# Altium PCB LCD.PcbDoc
Units mil, origin at the board's own origin, x right, y up, seen from the top; angles counter-clockwise.
Board outline 2155.85 x 1493.43 mil, 2 copper layers (Top Layer, Bottom Layer), stack 61.811 mil thick; 11 components, 19 nets, 50 pads, 0 vias.
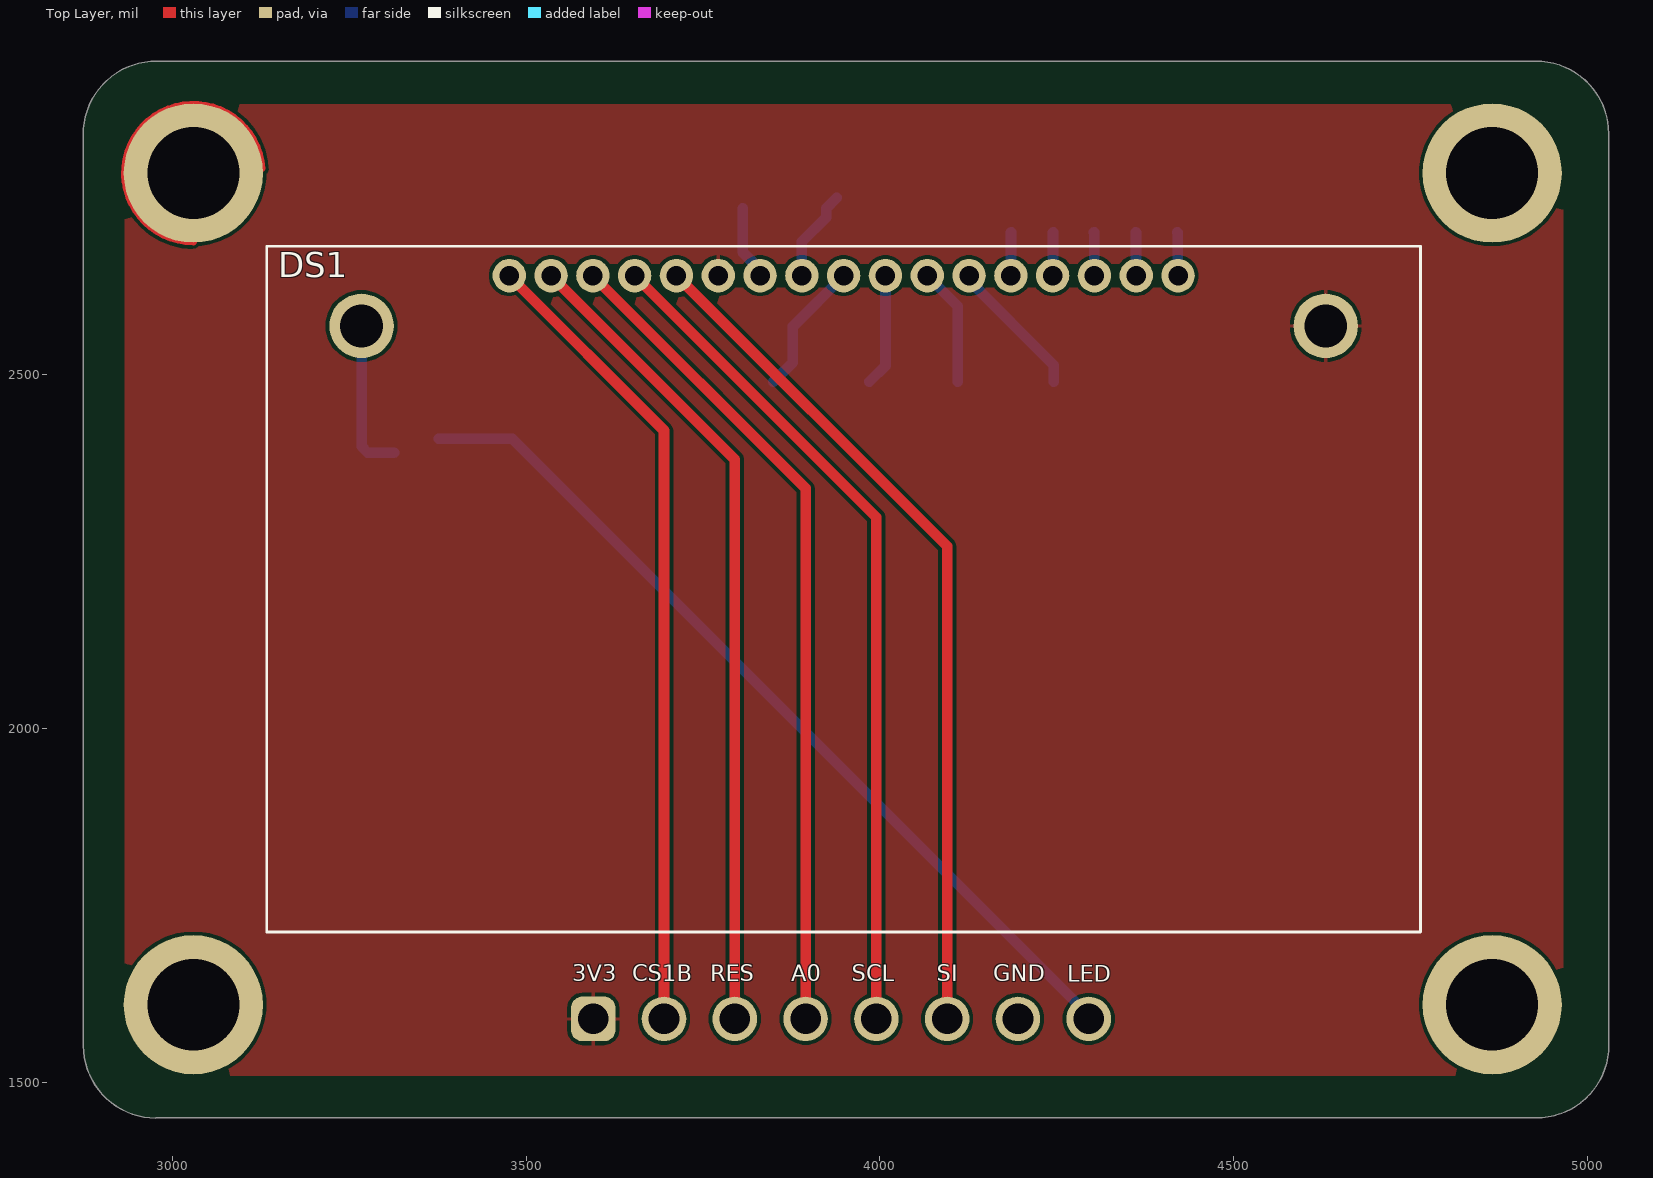
[diagram p0: Top Layer view]
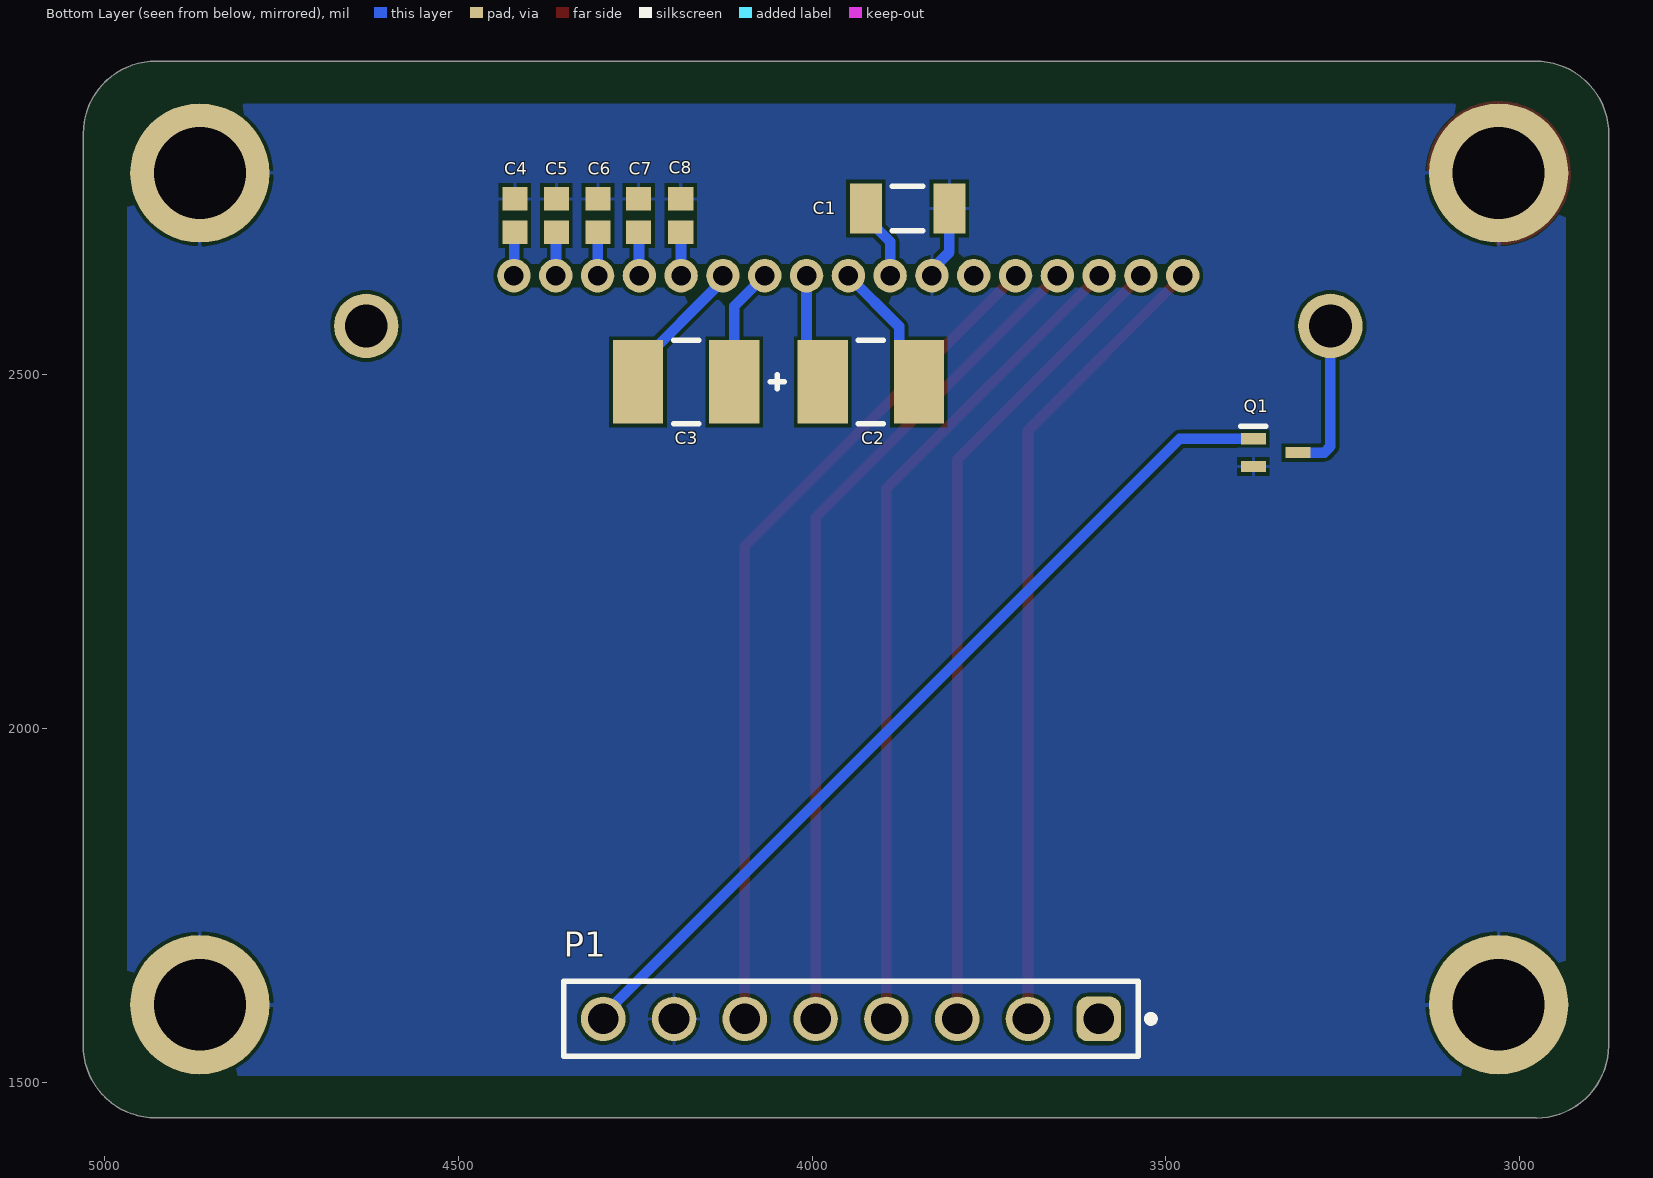
[diagram p1: Bottom Layer view, seen from below]

## Layer stack, top to bottom
Top Solder: solder mask 0.5, Solder Resist, Dk 3.8
Top Layer: signal copper 1.378
Dielectric: core 59.0551, FR-4, Dk 4.5
Bottom Layer: signal copper 1.378
Bottom Solder: solder mask 0.5, Solder Resist, Dk 3.8

## Board outline
2874.65,1552.26 ccw(c2977.07,1552.26) 2977.07,1449.84 2976.91,1450 4930,1450 4927.34,1450.12 ccw(c4927.34,1552.54) 5029.77,1552.54 5030,1550 5029.69,2840.31 ccw(c4926.73,2840.31) 4926.73,2943.27 2978.27,2943.27 ccw(c2978.27,2839.15) 2874.15,2839.15

## Design rules (kind name [scope] priority, off if disabled: settings)
BoardOutlineClearance [All] p1: gap=7.87 ignorepadtopadclearanceinfootprint=FALSE
Clearance [All] p1: gap=5 ignorepadtopadclearanceinfootprint=FALSE except(9.84: Arc-Hole Track-Hole SMDPad-Hole THPad-Hole Via-Hole Fill-Hole Poly-Hole Region-Hole Text-Hole)
ComponentClearance [All] p1: gap=5 collisioncheckmode=3 verticalgap=5 showdistances=TRUE
DiffPairsRouting [All] p1: maxlimit=10 minlimit=5 mostfreqgap=5 toplayer_minwidth=5 toplayer_maxwidth=1000 toplayer_prefwidth=5 bottomlayer_minwidth=5 bottomlayer_maxwidth=1000 bottomlayer_prefwidth=5 maxuncoupledlength=500
Height [All] p1: minheight=0 maxheight=71497.94 prefheight=500
HoleSize [All] p1: absolutevalues=TRUE maxlimit=248.03 minlimit=11.81 maxpercent=80.000 minpercent=20.000
HoleToHoleClearance [All] p1: gap=9.84 allowstackedmicrovias=FALSE
MinimumAnnularRing [All] p1: minimumring=3
MinimumSolderMaskSliver [All] p1: minsoldermaskwidth=0
PlaneClearance [All] p1: clearance=5
PlaneConnect PlaneConnectPowerPads [InPadClass('PowerPads')] p1: planeconnectstyle=Direct reliefexpansion=20 reliefentries=4 reliefconductorwidth=10 reliefairgap=10
PlaneConnect [All] p2: pad.planeconnectstyle=Relief pad.reliefexpansion=11.81 pad.reliefentries=4 pad.reliefconductorwidth=5 pad.reliefairgap=5 via.planeconnectstyle=Direct via.reliefexpansion=11.81 via.reliefentries=4 via.reliefconductorwidth=5 via.reliefairgap=5
PolygonConnect PolygonConnectPowerPads [All vs (InPadClass('PowerPads'))] p1: connectstyle=Direct reliefconductorwidth=10 reliefentries=4 polygonreliefangle="90 Angle" airgapwidth=10
PolygonConnect [All] p2: thpad.connectstyle=Relief thpad.reliefconductorwidth=5 thpad.reliefentries=4 thpad.polygonreliefangle="90 Angle" thpad.airgapwidth=5 smdpad.connectstyle=Relief smdpad.reliefconductorwidth=5 smdpad.reliefentries=4 smdpad.polygonreliefangle="90 Angle" smdpad.airgapwidth=5 via.connectstyle=Direct via.reliefconductorwidth=5 via.reliefentries=4 via.polygonreliefangle="90 Angle" via.airgapwidth=5
RoutingVias [All] p1: holewidth=11.81 width=23.62 viastyle="Through Hole" minholewidth=11.81 minwidth=23.62 maxholewidth=23.62 maxwidth=259.84
SilkToSilkClearance [All] p1: silktosilkclearance=0
SilkToSolderMaskClearance [IsPad] p1: minsilkscreentomaskgap=5 clearancetoexposedcopper=TRUE
SolderMaskExpansion [All] p1: expansion=2.95 istentingtop=FALSE
SupplyNets "Schematic Supply Nets_2" [InNet('GND')] p1: voltage=0.000
SupplyNets "Schematic Supply Nets" [InNet('+3V3')] p2: voltage=0.000
Width [All] p1: maxlimit=1000 minlimit=5 preferedwidth=5 minimp=50.000000 maximp=50.000000 favimp=50.000000
20 further rules are at their usual default settings.

## Components (designator, comment, footprint, x,y, rotation, side; value= is the part's Value field where it differs from the comment)
C1 "1uF" CAPC1206(3216)130_N 3865,2735 r180 bottom
C2 "1uF Tantalum" FP-293DB-MFG 3917.09,2490 r0 bottom
C3 "1uF Tantalum" FP-293DB-MFG 4177.91,2490 r180 bottom
C4 "100nF" CAPC1608X87X45LL20T05 4420,2725 r270 bottom
C5 "100nF" CAPC1608X87X45LL20T05 4361.3,2725 r270 bottom
C6 "100nF" CAPC1608X87X45LL20T05 4302.4,2725 r270 bottom
C7 "100nF" CAPC1608X87X45LL20T05 4245,2725 r270 bottom
C8 "100nF" CAPC1608X87X45LL20T05 4185.54,2725 r270 bottom
DS1 "NHD-C12832A1Z-FSW-FBW-3V3" NHDC12832A1ZFSWFBW3V3 4421.22,2640 r180 top
P1 "61300811121" 61300811121 3945,1590 r0 bottom
Q1 "DMN313DLT-7" SOT50P160X90-3N 3345,2390 r180 bottom

## Footprints (in the part's own frame and the unit in brackets; to place one, negate y for a bottom-side part, rotate by r counter-clockwise, add the part's x,y. Pads: shape width x height; smd on the part's side, far side on the other; paste and mask are expansions set on the pad)
61300811121 [mm] "Pin Header, pitch 2.54 mm, THT, Vertical, single row, 8p"
  rrect50% 1.6x1.6 hole 1.1: 1(-8.89,0)
  round 1.6 hole 1.1: 2(-6.35,0) 3(-3.81,0) 4(-1.27,0) 5(1.27,0) 6(3.81,0) 7(6.35,0) 8(8.89,0)
  silkscreen extent -10.88,-1.35 10.31,1.35, body extent -10.16,-1.27 10.16,1.27, height 8.57
CAPC1206(3216)130_N [mm] "Chip Capacitor, Body 3.2x1.6mm, Height 1.3mm, IPC Medium Density"
  rect 1.15x1.8 smd: 1(-1.5,0) 2(1.5,0)
  silkscreen extent -0.55,-0.8 0.55,0.8, body extent -1.7,-0.9 1.7,0.9, height 1.3
CAPC1608X87X45LL20T05 [mm] "Chip Capacitor, 2-Leads, Body 1.60x0.80mm, IPC High Density"
  rect 0.85x0.9 smd: 1(-0.6,0) 2(0.6,0)
  body extent -0.9,-0.5 0.9,0.5, height 0.87
FP-293DB-MFG [mm]
  rect 1.8x3 smd paste+0 mask+0: 1(-1.725,0) 2(1.725,0)
  silkscreen extent -0.45,-1.5 0.45,1.5, body extent -1.75,-1.4 1.75,1.4, height 2.1
NHDC12832A1ZFSWFBW3V3 [mm]
  round 1.2 hole 0.7: 1(0,0) 2(1.5,0) 3(3,0) 4(4.5,0) 5(6,0) 6(7.5,0) 7(9,0) 8(10.5,0) 9(12,0) 10(13.5,0) 11(15,0) 12(16.5,0) 13(18,0) 14(19.5,0) 15(21,0) 16(22.5,0) 17(24,0)
  round 2.31 hole 1.54: MH1(-5.3,1.8) MH2(29.3,1.8)
  silkscreen extent -8.7,-1.06 32.7,23.55, body extent -8.7,-0.75 32.7,23.55, height 4.3
SOT50P160X90-3N [mm]
  rect 0.9x0.4 smd: 1(-0.8,0.5) 2(-0.8,-0.5) 3(0.8,0)
  silkscreen extent -1.25,0.95 -0.35,0.95, body extent -0.8,-0.8 0.8,0.8, height 0.9

## Part data
C1: library part CMP-1037-04671-1, "CAP 1uF 10V ±5% 1206 (3216 Metric) Thickness 1.3mm SMD", Case-EIA=1206, Case-Metric=3216, Rated Voltage="10 V", Tolerance=Â±5%, Max Thickness="1.3 mm", Technology=SMT
C2 C3: library part CMP-00030-39694356-1, "293D105X9050B2TE3 Cap Tant Solid 1uF 50V B CASE 10% (3.5 X 2.8 X 1.9mm) Inward L SMD 3528-21 6.7 Ohm 125C T/R", Capacitance=1µF, Case Code (Imperial)=1411, Case Code (Metric)=3528, Dielectric Material=Tantalum, ESR (Equivalent Series Resistance)=6.7Ω, Leakage Current=500nA, Max Operating Temperature=125°C, Min Operating Temperature=-55°C, Ripple Current=110mA, Tolerance=10%, Voltage=50V, Voltage Rating (DC)=5V, Case/Package=1411, Depth=2.8mm, Dissipation Factor=4%, Features="General Purpose", Height=1.9mm, Height - Seated (Max)=2.1082mm, Lead Free="Lead Free", Length=3.5mm, Mount="Surface Mount", NexarPartId=39694356, Number of Pins=2, Packaging="Cut Tape", Polarity=Polar, Q Factor=4, Radiation Hardening=No, REACH SVHC=Unknown, RoHS=Compliant, Schedule B="8532210050, 8532210050", Termination=SMD/SMT, Voltage Rating=50V, Width=2.794mm
C4 C5 C6 C7 C8: library part CMP-2006-00001-1, "Ceramic 100nF X7R 16V 5%", Manufacturer=Kemet, Part Number=C0603X104J4RACTU
DS1: "Display", Manufacturer_Name="Newhaven Display", Mouser Part Number=763-C12832A1ZFSWFBW3, Datasheet Link=https://www.newhavendisplay.com/specs/NHD-C12832A1Z-FSW-FBW-3V3.pdf, Height=4.3mm, Manufacturer_Part_Number=NHD-C12832A1Z-FSW-FBW-3V3, Mouser Price/Stock=https://www.mouser.co.uk/ProductDetail/Newhaven-Display/NHD-C12832A1Z-FSW-FBW-3V3?qs=Vb5qD4CGh4nSmlh9l2%252Byrw%3D%3D
P1: library part CMP-1502-01076-3, Color=Black, Contact Resistance=20mΩ, Current Rating=3A, Max Operating Temperature=105°C, Min Operating Temperature=-40°C, Operating Supply Voltage=250V, Connector Type="Male Pin", Contact Material=Copper, Contact Mating Length=5.9944mm, Contact Plating=Gold, Gender=Male, Height=8.54mm, Lead Pitch=2.54mm, Mount="Through Hole", NexarPartId=32855533, Number of Contacts=8, Number of Pins=8, Number of Positions=8, Number of Rows=1, Orientation=Vertical, Packaging=Bulk, Pitch=2.54mm, REACH SVHC=Unknown, RoHS=Compliant, Termination=Solder, Voltage Rating=250V
Q1: "MOSFET (N-Channel)", Manufacturer_Name="Diodes Incorporated", Mouser Part Number=621-DMN313DLT-7, Arrow Part Number=DMN313DLT-7, Arrow Price/Stock=https://www.arrow.com/en/products/dmn313dlt-7/diodes-incorporated?region=europe, Datasheet Link=https://www.diodes.com//assets/Datasheets/DMN313DLT.pdf, Height=0.9mm, Manufacturer_Part_Number=DMN313DLT-7, Mouser Price/Stock=https://www.mouser.co.uk/ProductDetail/Diodes-Incorporated/DMN313DLT-7?qs=dOK1vf2izjtPPiEYvL6qdA%3D%3D

## Free pads (board coordinates)
  round 196.85 hole 129.92: 4(3030,1610) 4(3030,2785) 4(4865,1610) 4(4865,2785)

## Nets (pads, with @x,y where several pads share a name; then routed paths per layer and width w, separated by ;. In a path a pad name is that pad's centre, name@x,y a point inside that pad or via, vN(x,y) a via of type N, cw(c..) or ccw(c..) an arc to the next point about the centre after c; other vN are vias at no path point)
+3V3: DS1.12 DS1.MH1 P1.1
GND: C1.2 C4.1 C5.1 C6.1 C7.1 C8.1 DS1.11 P1.7 pad.4 Q1.2 | length 564.4
  Top Layer w10: pad.4@3030,2687.92 cw(c3030,2785) pad.4@3126.88,2791.25
  Bottom Layer w15: C1.2 3805.94,2673.45 3830.67,2648.73 DS1.11 DS1.11@3822.7,2640
LCD_A0: DS1.15 P1.4 | length 1174.5
  Top Layer w15: DS1.15 3895,2339.45 P1.4
LCD_CS1B: DS1.17 P1.2 | length 1140.6
  Top Layer w15: DS1.17 3695,2421.34 P1.2
LCD_RES: DS1.16 P1.3 | length 1157.5
  Top Layer w15: DS1.16 3795,2380.39 P1.3
LCD_SCL: DS1.14 P1.5 | length 1191.5
  Top Layer w15: DS1.14 3995,2298.5 P1.5
LCD_SI: DS1.13 P1.6 | length 1208.4
  Top Layer w15: DS1.13 4095,2257.56 P1.6
LED: P1.8 Q1.1 | length 1268.1
  Bottom Layer w5: P1.8@4288.93,1596.07 P1.8
  Bottom Layer w15: Q1.1 3480.31,2409.68 4291.43,1598.57 P1.8@4297.5,1592.5
LED-: DS1.MH2 Q1.3 | length 219.8
  Bottom Layer w15: DS1.MH2 3267.68,2398.79 3276.46,2390 Q1.3
NetC1_1: C1.1 DS1.10 | length 130.6
  Bottom Layer w15: DS1.10 3889.72,2687.87 3924.06,2722.2 C1.1 C1.1@3939.19,2750.14
NetC2_1: C2.1 DS1.9 | length 196.6
  Bottom Layer w15: C2.1 3877.11,2517.93 3877.11,2568.33 DS1.9 DS1.9@3943.46,2640
NetC2_2: C2.2 DS1.8 | length 159.5
  Bottom Layer w15: C2.2 4007.83,2512.83 DS1.8
NetC3_1: C3.1 DS1.6 | length 208.4
  Top Layer w15: DS1.6 DS1.6@4132.11,2646.17
  Bottom Layer w15: DS1.6 4125.94,2633.5 4245.83,2513.62 C3.1
NetC3_2: C3.2 DS1.7 | length 176.6
  Top Layer w15: DS1.7 DS1.7@4066.89,2648.73
  Bottom Layer w15: DS1.7 4110,2596.89 C3.2
V0: C4.2 DS1.1 | length 70.6
  Top Layer w15: DS1.1 DS1.1@4427.39,2646.17
  Bottom Layer w15: C4.2 4420.61,2700.77 4420.61,2640.61 DS1.1
V1: C5.2 DS1.2 | length 61.7
  Bottom Layer w15: C5.2 4361.73,2700.94 4361.73,2640.43 DS1.2
V2: C6.2 DS1.3 | length 61.7
  Bottom Layer w15: C6.2 4302.75,2701.02 4302.75,2640.36 DS1.3
V3: C7.2 DS1.4 | length 61.8
  Bottom Layer w15: DS1.4 4244.53,2640.47 4244.53,2700.91 C7.2
V4: C8.2 DS1.5 | length 61.6
  Bottom Layer w15: DS1.5 4185.27,2640.27 4185.27,2701.11 C8.2

## Polygon pours and split planes (outlines as drawn)
GND on Bottom Layer "NONET_L-01_P-001" (solid, remove dead copper, pour order 1): 2935,1610 2935,2790 cw(c3027.75,2790) 3027.76,2882.76 4872.7,2882.76 cw(c4872.9,2787.76) 4967.89,2787.76 4967.89,1602.89 cw(c4875,1602.89) 4875,1510 3035,1510 cw(c3035,1610)
+3V3 on Top Layer "NONET_L-01_P-001" (solid, remove dead copper, pour order 2): 2932.83,1609.41 2932.83,2789.41 cw(c3025.59,2789.41) 3025.59,2882.17 4870.53,2882.17 cw(c4870.73,2787.17) 4965.72,2787.17 4965.72,1602.3 cw(c4872.83,1602.3) 4872.83,1509.41 3032.83,1509.41 cw(c3032.83,1609.41)

## Silkscreen, mask and mechanical layers (free items; w line width, h text height)
Top Overlay:
  text "3V3" at 3565,1635.44 h39.37
  text "CS1B" at 3650,1635.44 h39.37
  text "RES" at 3760,1635.44 h39.37
  text "A0" at 3875,1635.44 h39.37
  text "SCL" at 3960,1635.44 h39.37
  text "SI" at 4080,1635.44 h39.37
  text "GND" at 4160,1635.44 h39.37
  text "LED" at 4265,1635 h39.37
Mechanical 1:
  lines w10: 2874.65,1552.26 ccw(c2977.07,1552.26) 2977.07,1449.84 ; 2875,1551.91 2874.15,2839.15 cw(c2978.27,2839.15) 2978.27,2943.27 4926.73,2943.27 cw(c4926.73,2840.31) 5029.69,2840.31 5030,1550 ; 2976.91,1450 4930,1450 ; 4927.34,1450.12 ccw(c4927.34,1552.54) 5029.77,1552.54